# Altium PCB ZD-STM32-ZOUYU(remove layoout).PcbDoc (part 1 of 8)
Units mm, origin at the board's own origin, x right, y up, seen from the top; angles counter-clockwise.
Board outline 251.84 x 139.06 mm, 2 copper layers (Top Layer, Bottom Layer); 253 components, 246 nets, 1172 pads, 599 vias.
Unrouted connection lines stored in the file: 47.
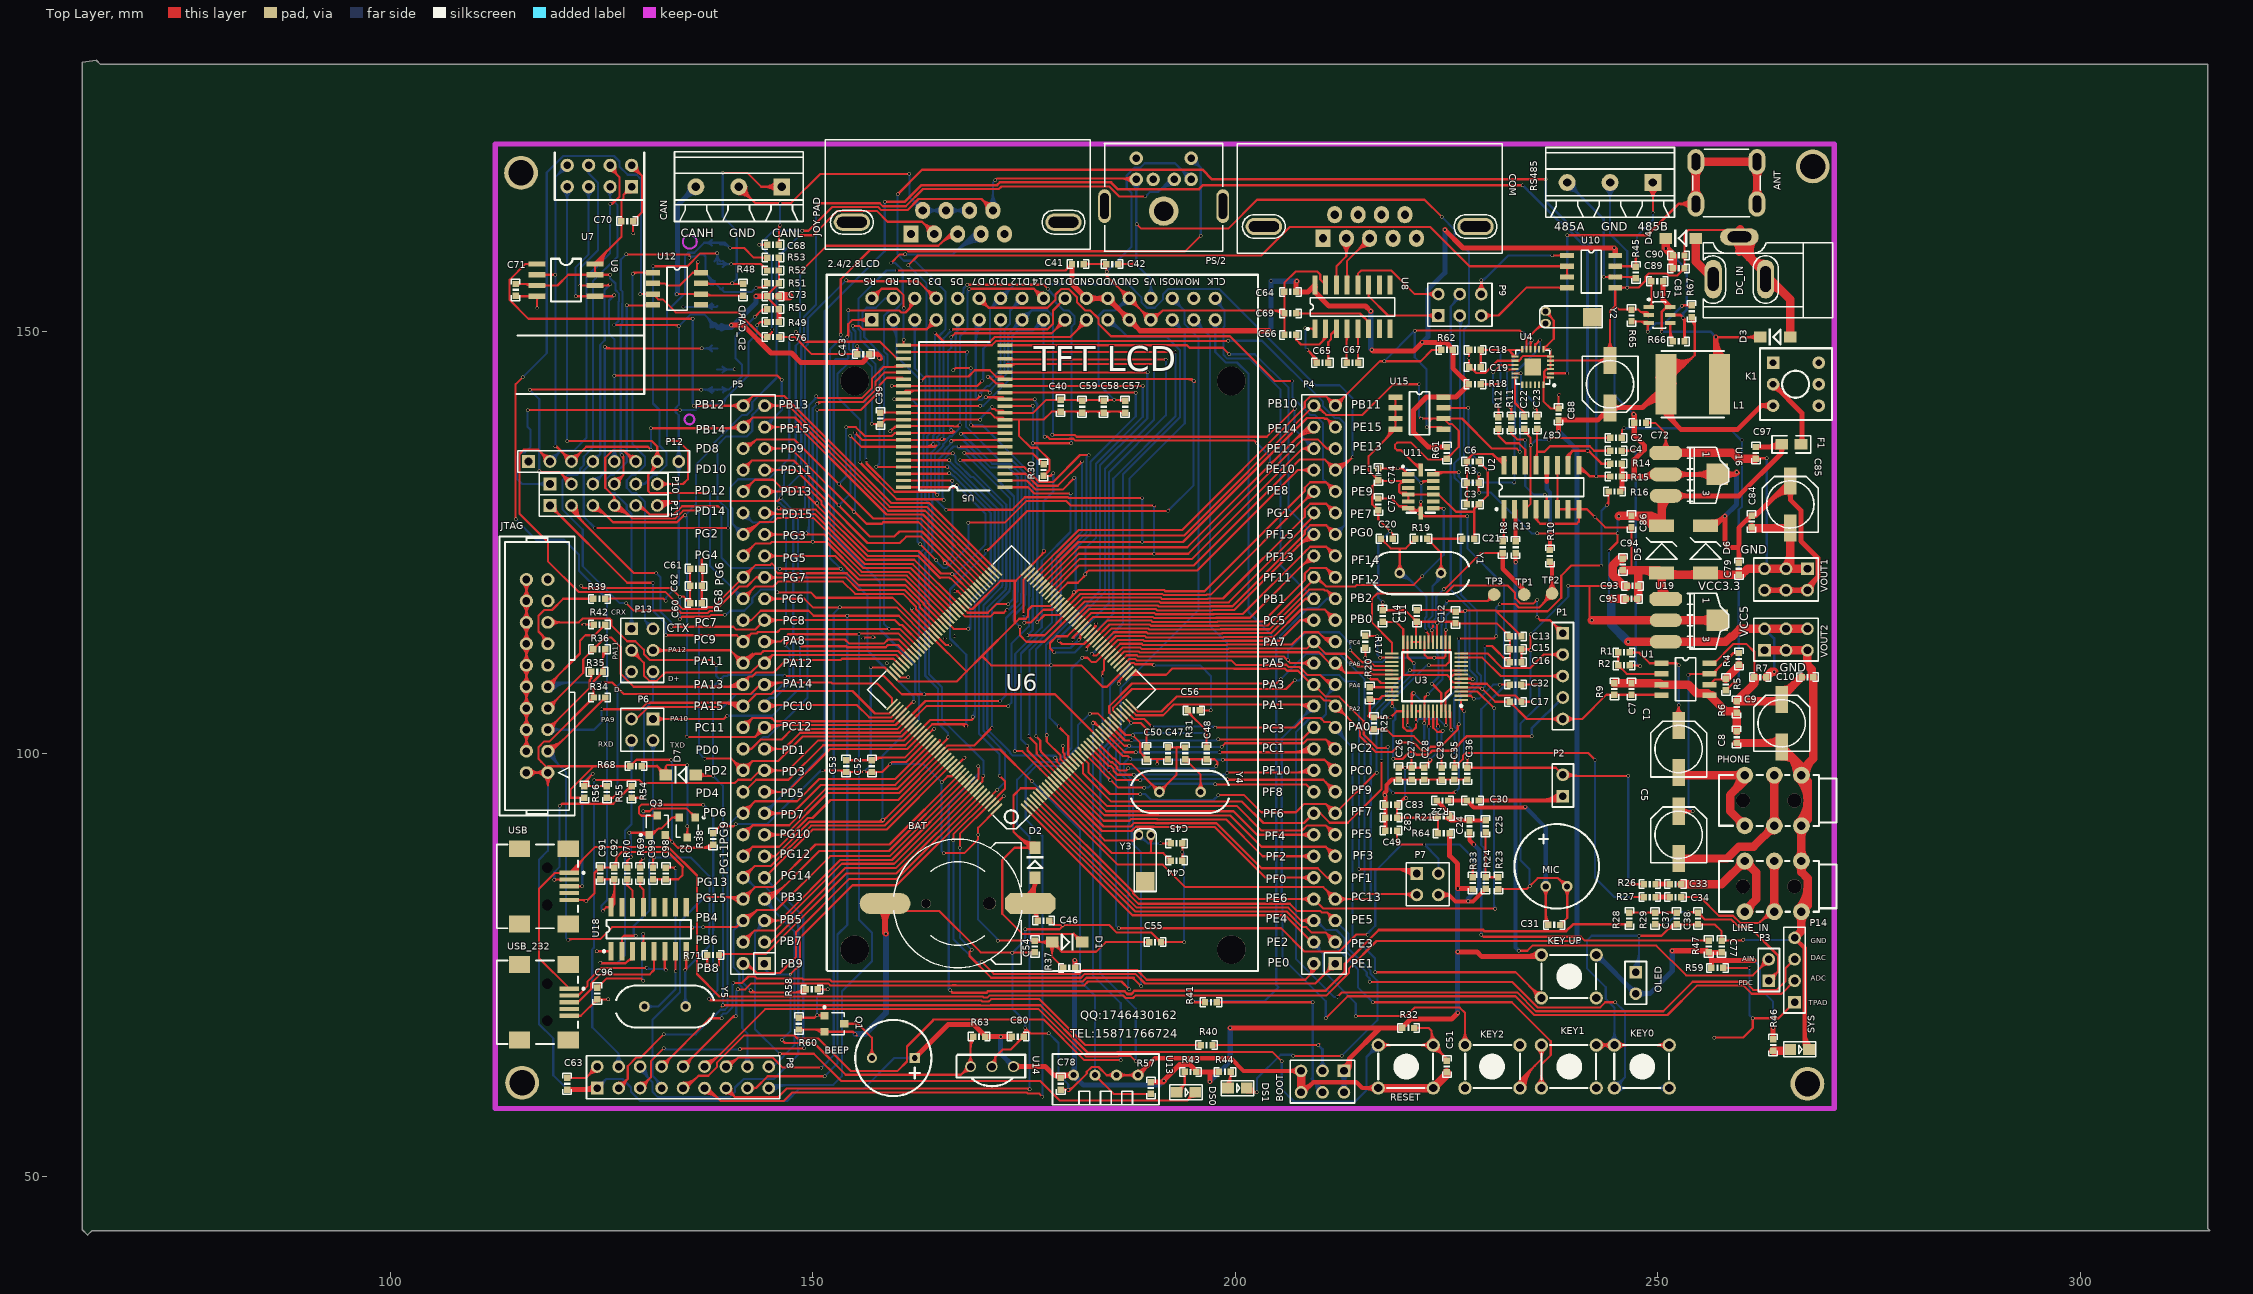
[diagram p0: Top Layer view]
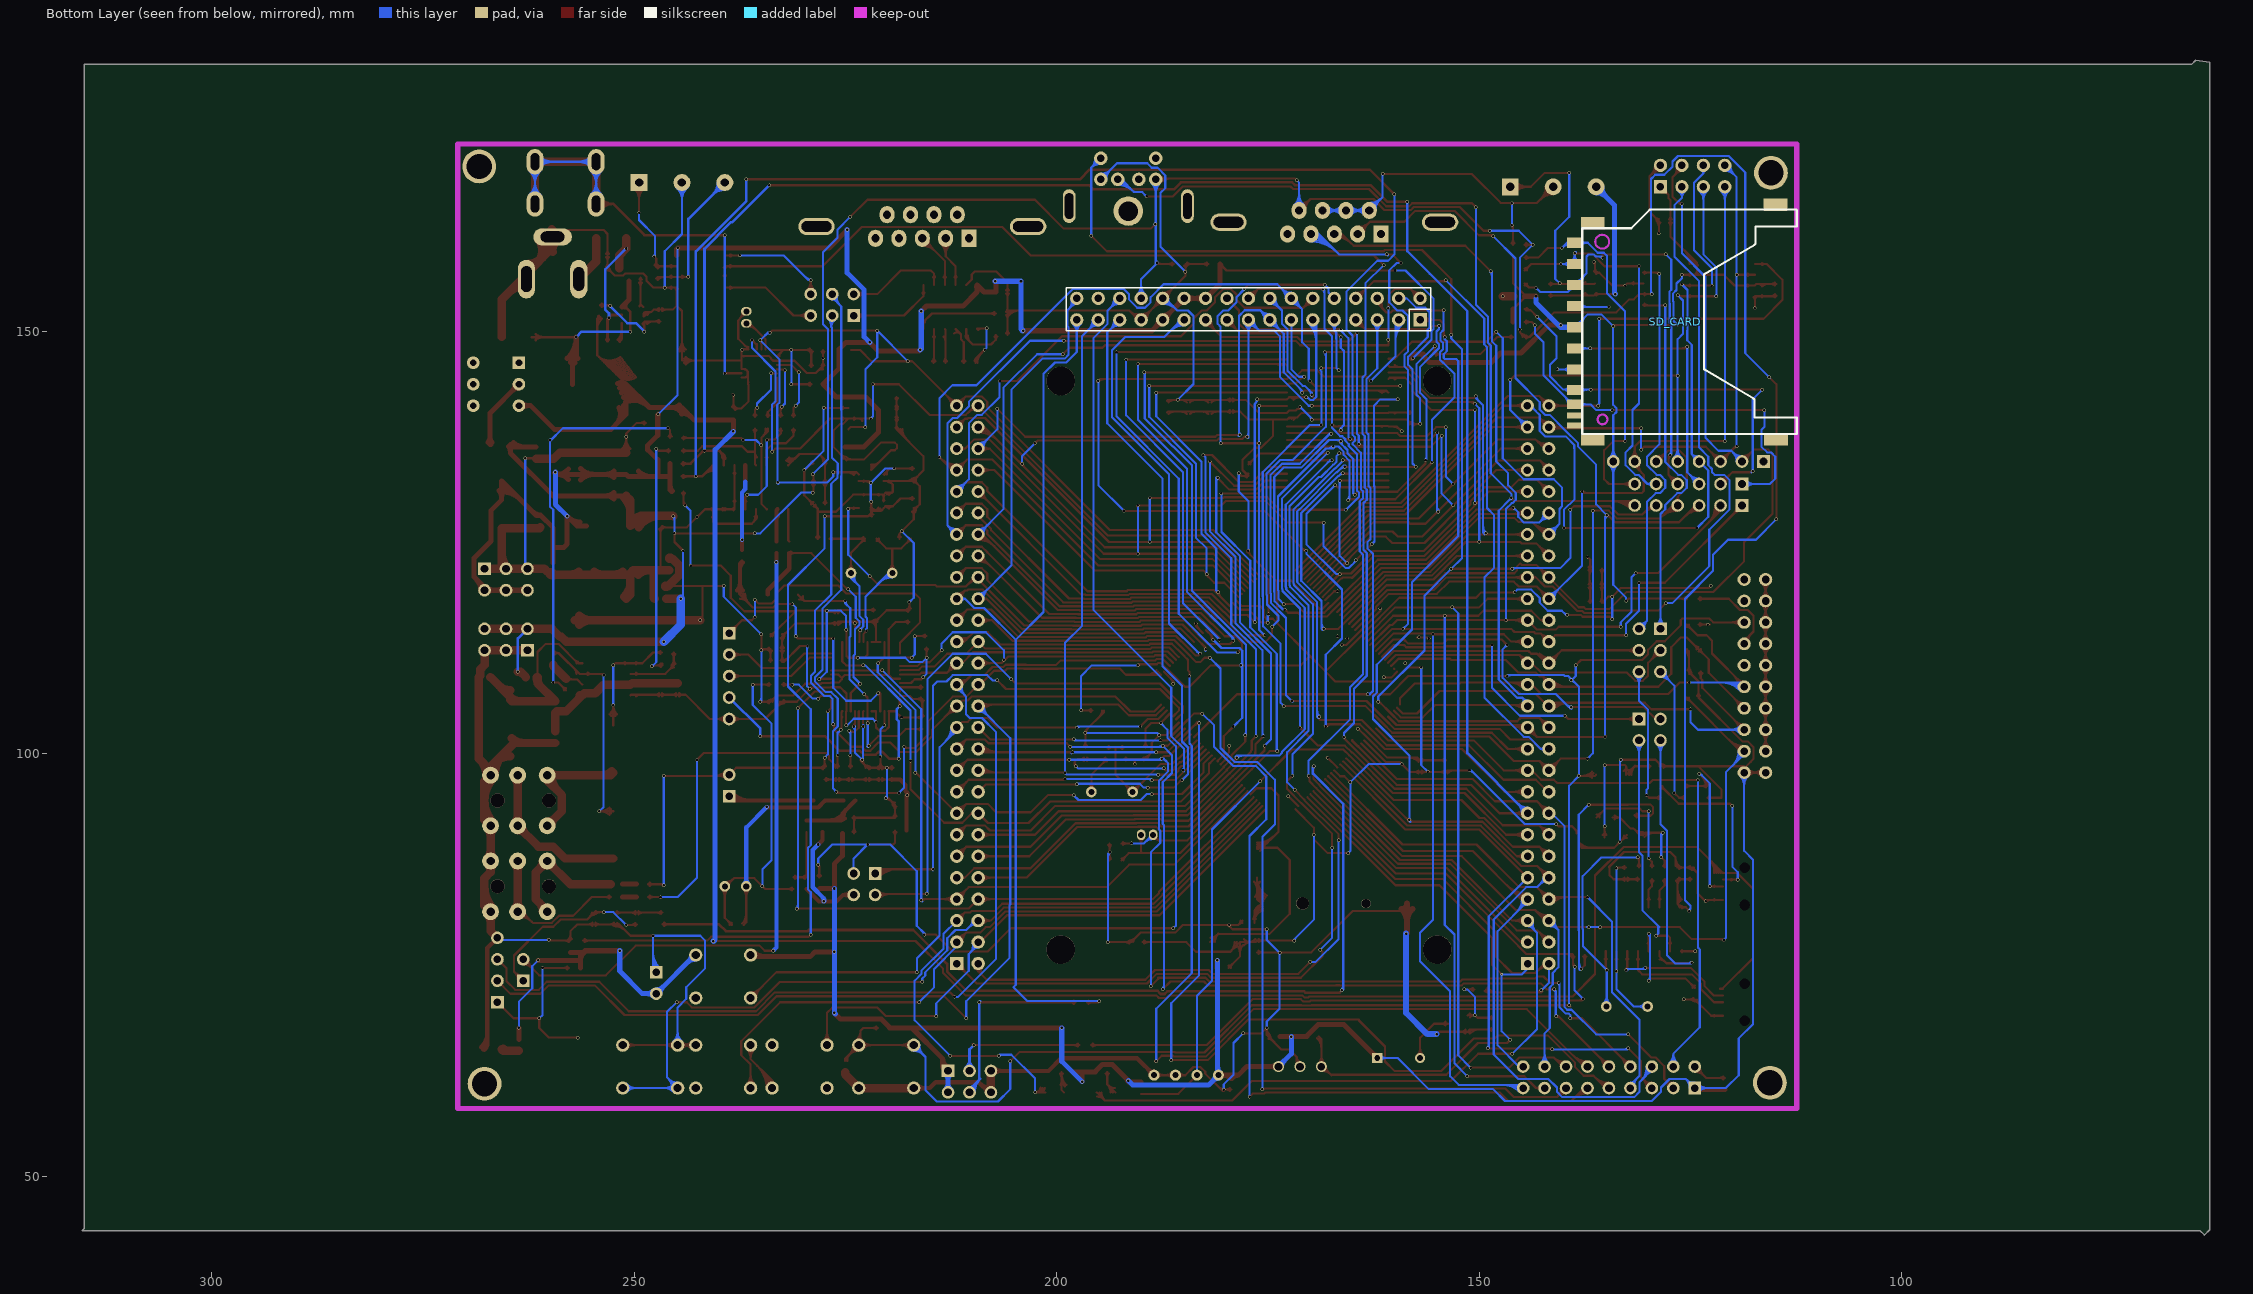
[diagram p1: Bottom Layer view, seen from below]

## Layer stack, top to bottom
Top Solder: solder mask 0.0102, Solder Resist, Dk 3.5
Top Layer: signal copper 0.0356
Dielectric1: dielectric 0.32, FR-4, Dk 4.8
Bottom Layer: signal copper 0.0356
Bottom Solder: solder mask 0.0102, Solder Resist, Dk 3.5

## Board outline
65.151,182.118 65.659,181.61 315.087,181.61 315.087,43.815 315.341,43.561 64.643,43.561 64.135,43.053 63.5,43.688 63.5,181.864

## Design rules (kind name [scope] priority, off if disabled: settings)
Clearance [All] p1: gap=0.2 ignorepadtopadclearanceinfootprint=FALSE except(0: Arc-Hole Track-Hole SMDPad-Hole THPad-Hole Via-Hole Fill-Hole Poly-Hole Region-Hole Text-Hole)
FabricationTestPointUsage TestPointUsage [All] p1: valid=0 allowmultiple=FALSE
FabricationTestpoint Testpoint [All] p1: side=3 testpointundercomponent=TRUE minsize=1.016 maxsize=2.54 preferedsize=1.524 minholesize=0 maxholesize=1.016 preferedholesize=0.813 testpointgrid=0.025 allowsidetop=TRUE allowsidebottom=TRUE usegrid=TRUE gridtolerance=0
PolygonConnect [All] p1: connectstyle=Relief reliefconductorwidth=0.254 reliefentries=4 polygonreliefangle="90 Angle" airgapwidth=0.254
RoutingVias [All] p1: holewidth=0.711 width=1.27 viastyle="Through Hole" minholewidth=0.711 minwidth=1.27 maxholewidth=0.711 maxwidth=1.27
SilkToSolderMaskClearance SilkscreenOverComponentPads [IsPad] p1: minsilkscreentomaskgap=0.254 clearancetoexposedcopper=TRUE
SolderMaskExpansion [All] p1: expansion=0.102
Width [All] p1: maxlimit=2 minlimit=0.254 preferedwidth=0.254
27 further rules are at their usual default settings.

## Classes and differential pairs
component class ZD-STM32: 2.4/2.8LCD BAT BOOT C39 C40 C41 C42 C43 C44 C45 C46 C47 C48 C49 C50 C51 C52 C53 C54 C55 C56 C57 C58 C59 C60 C61 C62 D1 D2 JTAG OLED P5 P6 P7 P14 R30 R31 R32 R33 R34 R35 R36 R37 R38 R39 R40 R41 R42 RESET U5 U6 Y3 Y4
component class POWER&USB: C81 C82 C83 C84 C85 C86 C87 C88 C89 C90 C91 C92 C93 C94 C95 C96 C97 C98 C99 D3 D4 D5 D6 D7 DC_IN F1 K1 L1 Q2 Q3 R64 R65 R66 R67 R68 R69 R70 R71 U16 U17 U18 U19 USB_232 VOUT1 VOUT2 Y5
component class DEVICE: BEEP C63 C64 C65 C66 C67 C68 C69 C70 C71 C72 C73 C74 C75 C76 C77 C78 C79 C80 CAN COM DS0 DS1 "JOY PAD" KEY0 KEY1 KEY2 "KEY UP" P8 P9 P10 P11 P12 P13 P14 PS/2 Q1 R43 R44 R45 R46 R47 R48 R49 R50 R51 R52 R53 R54 R55 R56 R57 R58 R59 R60 R61 R62 R63 RS485 SD_CARD SYS U7 U8 U9 U10 U11 U12 U13 U14 U15 USB
component class AUDIO: ANT C1 C2 C3 C4 C5 C6 C7 C8 C9 C10 C11 C12 C13 C14 C15 C16 C17 C18 C19 C20 C21 C22 C23 C24 C25 C26 C27 C28 C29 C30 C31 C32 C33 C34 C35 C36 C37 C38 LINE_IN MIC P1 P2 P3 PHONE R1 R2 R3 R4 R5 R6 R7 R8 R9 R10 R11 R12 R13 R14 R15 R16 R17 R18 R19 R20 R21 R22 R23 R24 R25 R26 R27 R28 R29 TP1 TP2 TP3 U1 U2 U3 U4 Y1 Y2

## Components (designator, comment, footprint, x,y, rotation, side; value= is the part's Value field where it differs from the comment)
2.4/2.8LCD "TFT_LCD" DB2*17 182.372,125.984 r0 top locked
ANT "PCB-11" PCB-11 254.508,165.1 r0 top
BAT "BATT" BATM 167.132,82.296 r90 top
BEEP "BEEP" BELL-5 162.052,64.008 r180 top
BOOT "Header 3X2" HDR2X3 212.852,62.484 r180 top
C1 "220uF" CC6.56.5 252.476,100.584 r270 top
C2 "1UF" 0603P 245.046,137.416 r0 top
C3 "10UF" 0603P 228.092,129.54 r0 top
C4 "1UF" 0603P 245.046,135.892 r0 top
C5 "220uF" CC6.56.5 252.476,90.424 r270 top
C6 "104" 0603P 228.092,134.62 r0 top
C7 "10UF" 0603P 246.888,107.696 r90 top
C8 "10UF" 0603P 259.334,101.981 r90 top
C9 "220uF" CC6.56.5 264.668,103.632 r270 top
C10 "104" 0603P 267.716,109.093 r180 top
C11 "104" 0603P 221.488,116.332 r90 top
C12 "104" 0603P 226.058,116.141 r90 top
C13 "104" 0603P 233.172,113.919 r0 top
C14 "104" 0603P 217.424,116.332 r270 top
C15 "104" 0603P 233.172,112.395 r0 top
C16 "104" 0603P 233.172,110.871 r0 top
C17 "104" 0603P 233.172,106.172 r0 top
C18 "104" 0603P 228.346,147.828 r0 top
C19 "10UF" 0603P 228.346,145.796 r0 top
C20 "22" 0603P 217.932,125.476 r180 top
C21 "22" 0603P 227.584,125.476 r180 top
C22 "1UF" 0603P 234.188,139.192 r90 top
C23 "1UF" 0603P 235.712,139.192 r90 top
C24 "10UF" 0603P 227.711,91.44 r90 top
C25 "10UF" 0603P 229.616,91.44 r90 top
C26 "104" 0603P 219.329,97.663 r90 top
C27 "104" 0603P 220.853,97.663 r90 top
C28 "104" 0603P 222.377,97.663 r90 top
C29 "1UF" 0603P 224.409,97.663 r270 top
C30 "1UF" 0603P 228.092,94.488 r0 top
C31 "1UF" 0603P 237.744,79.756 r180 top
C32 "1UF" 0603P 233.172,108.204 r180 top
C33 "1UF" 0603P 252.095,84.582 r180 top
C34 "1UF" 0603P 252.095,83.058 r180 top
C35 "103" 0603P 225.933,97.663 r90 top
C36 "103" 0603P 227.457,97.663 r90 top
C37 "102" 0603P 252.222,80.518 r90 top
C38 "101" 0603P 254.762,80.518 r90 top
C39 "104" 0603P 157.988,139.7 r90 top
C40 "104" 0603P 179.324,141.224 r270 top
C41 "104" 0603P 181.356,157.988 r180 top
C42 "104" 0603P 185.42,157.988 r0 top
C43 "104" 0603P 155.956,147.32 r180 top
C44 "10" 0603P 193.04,87.376 r180 top
C45 "10" 0603P 193.04,89.408 r180 top
C46 "104" 0603P 177.292,80.264 r180 top
C47 "104" 0603P 192.024,100.076 r90 top
C48 "104" 0603P 196.596,100.076 r270 top
C49 "104" 0603P 218.44,90.932 r0 top
C50 "104" 0603P 189.484,100.076 r90 top
C51 "104" 0603P 225.044,62.992 r90 top
C52 "104" 0603P 156.972,98.552 r90 top
C53 "104" 0603P 153.924,98.552 r90 top
C54 "104" 0603P 176.276,77.216 r270 top
C55 "104" 0603P 190.5,77.724 r0 top
C56 "104" 0603P 195.072,105.156 r180 top
C57 "104" 0603P 186.944,141.097 r90 top
C58 "104" 0603P 184.404,141.097 r90 top
C59 "104" 0603P 181.864,141.097 r90 top
C60 "104" 0603P 136.144,117.856 r0 top
C61 "104" 0603P 136.144,121.92 r0 top
C62 "104" 0603P 136.144,119.888 r0 top
C63 "104" 0603P 120.904,60.96 r90 top
C64 "104" 0603P 206.502,154.686 r180 top
C65 "104" 0603P 210.312,146.304 r180 top
C66 "104" 0603P 206.502,149.606 r0 top
C67 "104" 0603P 213.868,146.304 r180 top
C68 "104" 0603P 145.288,160.274 r180 top
C69 "104" 0603P 206.502,152.146 r0 top
C70 "104" 0603P 128.016,163.068 r0 top
C71 "104" 0603P 114.808,154.94 r270 top
C72 "104" 0603P 247.904,139.192 r0 top
C73 "104" 0603P 145.288,154.178 r180 top
C74 "104" 0603P 216.916,133.096 r90 top
C75 "104" 0603P 216.916,129.54 r90 top
C76 "104" 0603P 145.288,149.352 r0 top
C77 "104" 0603P 257.556,77.216 r270 top
C78 "104" 0603P 179.324,60.96 r90 top
C79 "104" 0603P 259.588,121.92 r90 top
C80 "104" 0603P 174.244,66.548 r180 top
C81 "103" 0603P 249.936,155.956 r0 top
C82 "104" 0603P 218.44,92.456 r0 top
C83 "104" 0603P 218.44,93.98 r0 top
C84 "104" 0603P 261.112,127.508 r90 top
C85 "220uF" CC6.56.5 265.684,129.54 r270 top
C86 "104" 0603P 246.888,127.508 r90 top
C87 "104" 0603P 238.252,140.208 r270 top
C88 "220uF" CC6.56.5 244.348,143.764 r90 top
C89 "104" 0603P 252.476,157.48 r180 top
C90 "104" 0603P 252.476,159.004 r180 top
C91 "104" 0603P 124.841,85.852 r90 top
C92 "104" 0603P 126.492,85.852 r90 top
C93 "104" 0603P 247.015,119.888 r180 top
C94 "104" 0603P 245.872,122.428 r90 top
C95 "104" 0603P 246.888,118.364 r180 top
C96 "104" 0603P 124.46,71.628 r90 top
C97 "104" 0603P 261.62,135.636 r90 top
C98 "22" 0603P 132.588,85.852 r90 top
C99 "22" 0603P 131.064,85.852 r90 top
CAN "CAN" MKDSN_3RMI 146.304,167.132 r180 top
COM "USART" DB9 215.9,161.036 r0 top
D1 "1N4148" DIODE_SOP 178.308,77.724 r0 top
D2 "1N4148" DIODE_SOP 176.276,85.344 r90 top
D3 "SS14" DIODE_SOP 265.684,149.352 r180 top
D4 "ss14" DIODE_SOP 254.508,161.036 r180 top
D5 "SMBJ5.0A" SMBJ 250.444,124.079 r90 top
D6 "SMBJ5.0A" SMBJ 255.651,124.079 r90 top
D7 "1N4148" DIODE_SOP 136.144,97.536 r180 top
DC_IN "POWER" DC10B 267.208,160.528 r180 top (schematic designator DC_IN?)
DS0 "LED1" SMDLED 193.04,59.944 r0 top
DS1 "LED1" SMDLED 199.136,60.452 r0 top
F1 "500MA" 0805 264.668,136.652 r0 top
"JOY PAD" "JOY" DB9 167.132,161.544 r0 top
JTAG "JTAG" JTAG_20 117.348,109.22 r90 top locked
K1 "BUTTON" BTN8.5*8.5 263.652,146.304 r0 top
KEY0 "KEY_M" KEY_M 244.856,65.532 r0 top
KEY1 "KEY_M" KEY_M 236.22,65.532 r0 top
KEY2 "KEY_M" KEY_M 233.68,60.452 r180 top
"KEY UP" "KEY_M" KEY_M 236.22,76.2 r0 top
L1 "4.7uH" L_SOP74 250.952,143.764 r0 top
LINE_IN "LINE_IN" PHONE_ST 263.652,84.328 r0 top
MIC "MIC" MIC 236.728,84.328 r0 top
OLED "MIC/LINE" HDR1X2 247.396,74.168 r270 top
P1 "IIS" HDR1X5 238.76,114.3 r270 top
P2 "MIC/LINE" HDR1X2 238.76,94.996 r90 top
P3 "OLED_VCC" HDR1X2 263.144,73.152 r90 top
P4 "HEAD2*27" HEAD2*27 211.836,75.184 r90 top
P5 "HEAD2*27" HEAD2*27 144.272,75.184 r90 top locked
P6 "VREF" HDR2X2 131.064,104.14 r180 top
P7 "VREF" HDR2X2 221.488,85.852 r270 top
P8 "OV7670" HDR2X9 124.46,60.452 r0 top
P9 "RS232/RS485" HDR2X3 224.028,151.892 r0 top
P10 "SDCARD" HDR1X6 118.872,131.953 r0 top (schematic designator "P10 SDCARD")
P11 "SDCARD" HDR1X6 118.872,129.413 r0 top (schematic designator "P11 SDIO")
P12 "SDSPI&NET" HDR1X8 116.332,134.62 r0 top (schematic designator "P12 SDSPI&NET")
P13 "USB/CAN" HDR2X3 128.524,114.808 r270 top
P14 "Header 4" HDR1X4 266.192,70.612 r90 top
PHONE "PHONE_M" PHONE_ST 263.652,94.488 r0 top
PS/2 "PS/2" PS2-6PIN 191.516,159.512 r180 top
Q1 "S8050" SOT-23R 152.4,68.072 r270 top
Q2 "S8050" SOT-23R 135.128,91.44 r180 top
Q3 "S8550" SOT-23R 131.572,91.44 r0 top
R1 "10K" 0603P 245.999,112.014 r0 top
R2 "10K" 0603P 245.999,110.49 r180 top
R3 "10R" 0603P 228.092,132.08 r0 top
R4 "10K" 0603P 259.588,111.252 r90 top
R5 "10K" 0603P 258.064,108.204 r90 top
R6 "10K" 0603P 259.334,105.537 r90 top
R7 "10R" 0603P 262.128,109.093 r0 top
R8 "1K" 0603P 231.648,124.46 r90 top
R9 "10K" 0603P 244.856,107.696 r90 top
R10 "1K" 0603P 237.236,123.444 r90 top
R11 "1K" 0603P 232.664,139.192 r270 top
R12 "1K" 0603P 231.14,139.192 r270 top
R13 "1K" 0603P 233.172,124.46 r90 top
R14 "10K" 0603P 245.046,134.368 r0 top
R15 "10K" 0603P 245.046,132.844 r0 top
R16 "0R" 0603P 244.856,131.064 r0 top
R17 "100K" 0603P 215.392,113.284 r270 top
R18 "10R" 0603P 228.346,143.764 r180 top
R19 "1M" 0603P 221.996,125.476 r0 top
R20 "100K" 0603P 215.9,107.188 r90 top
R21 "1K" 0603P 224.663,92.634 r180 top
R22 "1K" 0603P 224.536,94.488 r180 top
R23 "1K" 0603P 231.14,84.709 r270 top
R24 "1K" 0603P 229.616,84.709 r90 top
R25 "1K" 0603P 216.408,103.632 r270 top
R26 "510" 0603P 249.047,84.582 r180 top
R27 "510" 0603P 249.047,83.058 r180 top
R28 "4.7K" 0603P 246.634,80.518 r90 top
R29 "47K" 0603P 249.682,80.518 r270 top
R30 "10K" 0603P 177.292,133.604 r270 top
R31 "1M" 0603P 194.056,100.076 r270 top
R32 "10K" 0603P 220.472,67.564 r180 top
R33 "10R" 0603P 228.092,84.709 r270 top
R34 "10K" 0603P 124.714,106.68 r0 top
R35 "10K" 0603P 124.46,109.728 r180 top
R36 "10K" 0603P 124.714,112.395 r180 top
R37 "0" 0603P 180.34,74.676 r180 top
R38 "0" 0603P 138.176,89.916 r90 top
R39 "10K" 0603P 124.714,118.364 r180 top
R40 "100K" 0603P 196.596,65.532 r0 top
R41 "100K" 0603P 197.104,70.612 r180 top
R42 "10K" 0603P 124.714,115.316 r0 top
R43 "510" 0603P 194.691,62.357 r0 top
R44 "510" 0603P 198.755,62.357 r180 top
R45 "120" 0603P 247.396,156.972 r90 top
R46 "510" 0603P 263.652,65.532 r90 top
R47 "10R" 0603P 256.032,77.216 r270 top
R48 "120" 0603P 141.732,154.94 r90 top
R49 "47K" 0603P 145.288,151.13 r180 top
R50 "47K" 0603P 145.288,152.654 r180 top
R51 "47K" 0603P 145.288,155.702 r180 top
R52 "47K" 0603P 145.288,157.226 r180 top
R53 "47K" 0603P 145.288,158.75 r180 top
R54 "10R" 0603P 128.524,95.504 r90 top
R55 "10R" 0603P 125.603,95.504 r90 top
R56 "1.5K" 0603P 122.936,95.504 r90 top
R57 "4.7K" 0603P 189.992,60.452 r90 top
R58 "1K" 0603P 149.86,72.136 r180 top
R59 "5.1M" 0603P 257.048,74.676 r180 top
R60 "10K" 0603P 148.336,68.072 r90 top
R61 "4.7K" 0603P 225.044,135.636 r90 top
R62 "4.7K" 0603P 225.044,147.828 r0 top
R63 "4.7K" 0603P 169.672,66.548 r0 top
R64 "10R" 0603P 224.663,90.602 r0 top
R65 "9.53K" 0603P 246.888,151.892 r90 top
R66 "100K" 0603P 252.476,148.844 r180 top
R67 "49.9K" 0603P 254,152.4 r90 top
R68 "10K" 0603P 129.032,98.552 r0 top
R69 "1K" 0603P 129.54,85.852 r90 top
R70 "1K" 0603P 128.016,85.852 r90 top
R71 "1K" 0603P 138.176,76.2 r0 top
RESET "KEY_M" KEY_M 216.916,65.532 r0 top
RS485 "RS485" MKDSN_3RMI 249.428,167.64 r180 top
SD_CARD "sd card" SDCARD_L 138.684,157.988 r90 bottom
SYS "LED1" SMDLED 265.684,65.024 r0 top
TP1 "TEST POINT" TP-1.5 234.188,118.872 r0 top
TP2 "TEST POINT" TP-1.5 237.49,118.999 r90 top
TP3 "TEST POINT" TP-1.5 230.632,118.872 r90 top
U1 "TDA1308T" SOP-8 250.444,110.744 r0 top
U2 "74HC4052" SOP16M 236.22,131.572 r0 top
U3 "VS1053B/VS1003B" mTQFP48 222.504,107.696 r180 top
U4 "RDA5820" QFN24 235.204,145.796 r180 top
U5 "IS62WV51216" TSOP44 172.72,131.572 r180 top
U6 "STM32F103ZET6" LQFP144 175.26,93.472 r135 top locked
U7 "NRF24L01" NRF24L01 128.524,169.672 r90 top
U8 "SP3232" SOP16M 213.868,152.908 r0 top
U9 "W25Q64" SOIC-8 117.348,157.988 r0 top
U10 "SP3485" SOP-8 239.268,159.004 r0 top
U11 "ADXL345Z" LGA14 220.472,133.096 r0 top
U12 "TJA1050" SOP-8 131.064,156.972 r0 top
U13 "DHT11&DS18B20" DHT11 180.848,61.976 r0 top
U14 "HS0038" HS0038 168.656,62.992 r0 top
U15 "24C02" SOP-8 218.948,142.24 r0 top
U16 "AMS1117-3.3" AMS1117 250.952,135.636 r270 top
U17 "MP2359" SOT-23-6 248.92,152.908 r0 top
U18 "CH340G" SOP16M 130.556,79.248 r0 top
U19 "AMS1117-1.8" AMS1117 250.952,118.364 r270 top
USB "USB" USB/SM0.8-6H5 113.284,84.328 r180 top
USB_232 "USB" USB/SM0.8-6H5 113.284,70.612 r180 top
VOUT1 "VCC3.3" HDR2X3 267.716,121.92 r180 top
VOUT2 "VCC5" HDR2X3 262.636,112.268 r0 top
Y1 "12.288MHz" XTAL_US 219.456,121.412 r0 top
Y2 "32.768KHz" XTAL32 236.728,152.4 r0 top
Y3 "32.768K" XTAL32 189.992,90.424 r270 top
Y4 "8MHz" XTAL_US 191.008,95.504 r0 top
Y5 "12.288MHz" XTAL_US 130.048,70.104 r0 top

## Footprints (in the part's own frame and the unit in brackets; to place one, negate y for a bottom-side part, rotate by r counter-clockwise, add the part's x,y. Pads: shape width x height; smd on the part's side, far side on the other; paste and mask are expansions set on the pad)
0603P [mil]
  rect 30x30 smd: 1(-27,0) 2(27.5,-0.06)
  silkscreen extent -50,-20 50,20
0805 [mil]
  rect 60x50 smd: 1(0,0) 2(90,0)
  silkscreen extent -45,-40 135,40
AMS1117 [mil]
  oct 65x150 smd: 1(0.03,-0.06)
  oval 65x150 smd: 2(100.03,-0.06) 3(200.03,-0.06)
  rect 100x100 smd: 4(100.03,239.94)
  silkscreen extent -26,100 234,293
BATM [mm]
  round 1.1 hole 1.1 unplated: 0(0,3.748)
  round 1.5 hole 1.5 unplated: 0(0.025,-3.752)
  oct 2.5x6 smd: 1(0,-8.602)
  oval 2.5x6 smd: 2(0,8.598)
  silkscreen extent -7.62,-7.58 7.62,7.57
BELL-5 [mm]
  rect 1.2x1.2 hole 0.7: 1(0,0)
  round 1.2 hole 0.7: 2(5.08,0)
  silkscreen extent -1.97,-4.51 7.05,4.51
BTN8.5*8.5 [mm]
  rect 1.5x1.5 hole 0.8: 1(0,0)
  round 1.5 hole 0.8: 2(0,-2.54) 3(0,-5.08) 4(5.4,-5.08) 5(5.4,-2.54) 6(5.4,0)
  silkscreen extent -1.55,-6.79 6.95,1.71
CC6.56.5 [mm]
  rect 3.2x1.5 smd: 1(-2.794,0) 2(2.8,0)
  silkscreen extent -3.3,-3.3 3.3,3.3
DB2*17 [mil]
  rect 62x62 hole 35: 1(-1000,1000)
  round 62 hole 35: 2(-1000,1100) 3(-900,1000) 4(-900,1100) 5(-800,1000) 6(-800,1100) 7(-700,1000) 8(-700,1100) 9(-600,1000) 10(-600,1100) 11(-500,1000) 12(-500,1100) 13(-400,1000) 14(-400,1100) 15(-300,1000) 16(-300,1100) 17(-200,1000) 18(-200,1100) 19(-100,1000) 20(-100,1100) 21(0,1000) 22(0,1100) 23(100,1000) 24(100,1100) 25(200,1000) 26(200,1100) 27(300,1000) 28(300,1100) 29(400,1000) 30(400,1100) 31(500,1000) 32(500,1100) 33(600,1000) 34(600,1100)
  round 133.86 hole 133.86: ""(-1080,-1935) ""(-1080,715) ""(675,-1935) ""(675,715)
  silkscreen extent -1210,-2035 800,1210
DB9 [mil]
  oval 170x80 hole 50 slot 140 at 0 deg: 0(-493,55) 0(493,55)
  rect 70x80 hole 38: 1(-218,0)
  oval 70x80 hole 38: 2(-109,0) 3(0,0) 4(109,0) 5(218,0) 6(-163,110) 7(-54,110) 8(55,110) 9(164,110)
  silkscreen extent -618,-70 618,440
DC10B [mil]
  oval 80x180 hole 50 slot 110 at 90 deg: 1(419.09,170)
  oval 80x180 hole 50 slot 120 at 90 deg: 2(175,170)
  oval 180x80 hole 50 slot 110 at 0 deg: 3(297.05,-26.85)
  silkscreen extent -138,0 465,350
DHT11 [mm]
  round 1.3 hole 0.7: 1(0,0) 2(2.54,0) 3(5.08,0) 4(7.62,0)
  silkscreen extent -2.5,-3.5 10.12,2.5
DIODE_SOP [mm]
  rect 1.5x1.3 smd: 1(0,0) 2(3.556,0)
  silkscreen extent 1.14,-1.02 2.56,1.02
HDR1X2 [mm]
  rect 1.5x1.5 hole 0.9: 1(0,0)
  round 1.5 hole 0.9: 2(2.54,0)
  silkscreen extent -1.27,-1.27 3.81,1.27
HDR1X4 [mm]
  rect 1.5x1.5 hole 0.9: 1(0,0)
  round 1.5 hole 0.9: 2(2.54,0) 3(5.08,0) 4(7.62,0)
  silkscreen extent -1.27,-1.27 8.89,1.27
HDR1X5 [mm]
  rect 1.5x1.5 hole 0.9: 1(0,0)
  round 1.5 hole 0.9: 2(2.54,0) 3(5.08,0) 4(7.62,0) 5(10.16,0)
  silkscreen extent -1.27,-1.27 11.43,1.27
HDR1X6 [mm]
  rect 1.5x1.5 hole 0.9: 1(0,0)
  round 1.5 hole 0.9: 2(2.54,0) 3(5.08,0) 4(7.62,0) 5(10.16,0) 6(12.7,0)
  silkscreen extent -1.27,-1.27 13.97,1.27
HDR1X8 [mm]
  rect 1.5x1.5 hole 0.9: 1(0,0)
  round 1.5 hole 0.9: 2(2.54,0) 3(5.08,0) 4(7.62,0) 5(10.16,0) 6(12.7,0) 7(15.24,0) 8(17.78,0)
  silkscreen extent -1.27,-1.27 19.05,1.27
HDR2X2 [mm]
  rect 1.5x1.5 hole 0.9: 1(0,0)
  round 1.5 hole 0.9: 2(0,2.54) 3(2.54,0) 4(2.54,2.54)
  silkscreen extent -1.27,-1.27 3.81,3.81
HDR2X3 [mm]
  rect 1.5x1.5 hole 0.9: 1(0,0)
  round 1.5 hole 0.9: 2(0,2.54) 3(2.54,0) 4(2.54,2.54) 5(5.08,0) 6(5.08,2.54)
  silkscreen extent -1.27,-1.27 6.35,3.81
HDR2X9 [mm]
  rect 1.5x1.5 hole 0.9: 1(0,0)
  round 1.5 hole 0.9: 2(0,2.54) 3(2.54,0) 4(2.54,2.54) 5(5.08,0) 6(5.08,2.54) 7(7.62,0) 8(7.62,2.54) 9(10.16,0) 10(10.16,2.54) 11(12.7,0) 12(12.7,2.54) 13(15.24,0) 14(15.24,2.54) 15(17.78,0) 16(17.78,2.54) 17(20.32,0) 18(20.32,2.54)
  silkscreen extent -1.27,-1.27 21.59,3.81
HEAD2*27 [mil]
  rect 62x62 hole 35: 1(0.43,0.42)
  round 62 hole 35: 2(0.43,100.42) 3(100.43,0.42) 4(100.43,100.42) 5(200.43,0.42) 6(200.43,100.42) 7(300.43,0.42) 8(300.43,100.42) 9(400.43,0.42) 10(400.43,100.42) 11(500.43,0.42) 12(500.43,100.42) 13(600.43,0.42) 14(600.43,100.42) 15(700.43,0.42) 16(700.43,100.42) 17(800.43,0.42) 18(800.42,100.42) 19(900.43,0.42) 20(900.43,100.42) 21(1000.43,0.42) 22(1000.43,100.42) 23(1100.43,0.42) 24(1100.43,100.42) 25(1200.43,0.42) 26(1200.43,100.42) 27(1300.43,0.42) 28(1300.42,100.42) 29(1400.43,0.42) 30(1400.43,100.42) 31(1500.43,0.42) 32(1500.43,100.42) 33(1600.43,0.42) 34(1600.43,100.42)
  round 60 hole 35: 35(1700,0) 36(1700,100) 37(1800,0) 38(1800,100) 39(1900,0) 40(1900,100) 41(2000,0) 42(2000,100) 43(2100,0) 44(2100,100) 45(2200,0) 46(2200,100) 47(2300,0) 48(2300,100) 49(2400,0) 50(2400,100) 51(2500,0) 52(2500,100) 53(2600,0) 54(2600,100)
  silkscreen extent -50,-50 2650,157
HS0038 [mm]
  round 1.3 hole 0.9: 1(0,0) 2(2.54,0) 3(5.08,0)
  silkscreen extent -1.65,-2.32 6.48,1.4
JTAG_20 [mm]
  oval 1.5x1.575 hole 0.9: 1(-11.43,-1.27) 2(-11.43,1.27) 3(-8.89,-1.27) 4(-8.89,1.27) 5(-6.35,-1.27) 6(-6.35,1.27) 7(-3.81,-1.27) 8(-3.81,1.27) 9(-1.27,-1.27) 10(-1.27,1.27) 11(1.27,-1.27) 12(1.27,1.27) 13(3.81,-1.27) 14(3.81,1.27) 15(6.35,-1.27) 16(6.35,1.27) 17(8.89,-1.27) 18(8.89,1.27) 19(11.43,-1.27) 20(11.43,1.27)
  silkscreen extent -16.51,-4.45 16.51,4.45
KEY_M [mil]
  round 62 hole 38: 1(0,0) 1(255.91,0) 2(0,-200) 2(255.91,-200)
  silkscreen extent 0,-200 255,0
L_SOP74 [mm]
  rect 2.5x7.2 smd: 1(0,0) 2(6.35,0)
  silkscreen extent -0.51,-3.94 6.89,3.94
LGA14 [mm]
  rect 1.5x0.5 smd: 1(0,0) 2(0,-0.8) 3(0,-1.6) 4(0,-2.4) 5(0,-3.2) 6(0,-4) 8(2.954,-4) 9(2.954,-3.2) 10(2.954,-2.4) 11(2.954,-1.6) 12(2.954,-0.8) 13(2.954,0)
  rect 0.5x1.5 smd: 7(1.473,-4.572) 14(1.473,0.508)
  silkscreen extent -0.76,-4.55 3.17,1.03
LQFP144 [mm]
  rect 1.8x0.254 smd: 1(-0.009,0.001) 2(-0.009,-0.499) 3(-0.009,-0.999) 4(-0.009,-1.499) 5(-0.009,-1.999) 6(-0.009,-2.499) 7(-0.009,-2.999) 8(-0.009,-3.499) 9(-0.009,-3.999) 10(-0.009,-4.499) 11(-0.009,-4.999) 12(-0.009,-5.499) 13(-0.009,-5.999) 14(-0.009,-6.499) 15(-0.009,-6.999) 16(-0.009,-7.499) 17(-0.009,-7.999) 18(-0.009,-8.499) 19(-0.009,-8.999) 20(-0.009,-9.499) 21(-0.009,-9.999) 22(-0.009,-10.499) 23(-0.009,-10.999) 24(-0.009,-11.499) 25(-0.009,-11.999) 26(-0.009,-12.499) 27(-0.009,-12.999) 28(-0.009,-13.499) 29(-0.009,-13.999) 30(-0.009,-14.499) 31(-0.009,-14.999) 32(-0.009,-15.499) 33(-0.009,-15.999) 34(-0.009,-16.499) 35(-0.009,-16.999) 36(-0.009,-17.499) 73(22.491,-17.499) 74(22.491,-16.999) 75(22.491,-16.499) 76(22.491,-15.999) 77(22.491,-15.499) 78(22.491,-14.999) 79(22.491,-14.499) 80(22.491,-13.999) 81(22.491,-13.499) 82(22.491,-12.999) 83(22.491,-12.499) 84(22.491,-11.999) 85(22.491,-11.499) 86(22.491,-10.999) 87(22.491,-10.499) 88(22.491,-9.999) 89(22.491,-9.499) 90(22.491,-8.999) 91(22.491,-8.499) 92(22.491,-7.999) 93(22.491,-7.499) 94(22.491,-6.999) 95(22.491,-6.499) 96(22.491,-5.999) 97(22.491,-5.499) 98(22.491,-4.999) 99(22.491,-4.499) 100(22.491,-3.999) 101(22.491,-3.499) 102(22.491,-2.999) 103(22.491,-2.499) 104(22.491,-1.999) 105(22.491,-1.499) 106(22.491,-0.999) 107(22.491,-0.499) 108(22.491,0.001)
  rect 0.254x1.8 smd: 37(2.491,-19.999) 38(2.991,-19.999) 39(3.491,-19.999) 40(3.991,-19.999) 41(4.491,-19.999) 42(4.991,-19.999) 43(5.491,-19.999) 44(5.991,-19.999) 45(6.491,-19.999) 46(6.991,-19.999) 47(7.491,-19.999) 48(7.991,-19.999) 49(8.491,-19.999) 50(8.991,-19.999) 51(9.491,-19.999) 52(9.991,-19.999) 53(10.491,-19.999) 54(10.991,-19.999) 55(11.491,-19.999) 56(11.991,-19.999) 57(12.491,-19.999) 58(12.991,-19.999) 59(13.491,-19.999) 60(13.991,-19.999) 61(14.491,-19.999) 62(14.991,-19.999) 63(15.491,-19.999) 64(15.991,-19.999) 65(16.491,-19.999) 66(16.991,-19.999) 67(17.491,-19.999) 68(17.991,-19.999) 69(18.491,-19.999) 70(18.991,-19.999) 71(19.491,-19.999) 72(19.991,-19.999) 109(19.991,2.501) 110(19.491,2.501) 111(18.991,2.501) 112(18.491,2.501) 113(17.991,2.501) 114(17.491,2.501) 115(16.991,2.501) 116(16.491,2.501) 117(15.991,2.501) 118(15.491,2.501) 119(14.991,2.501) 120(14.491,2.501) 121(13.991,2.501) 122(13.491,2.501) 123(12.991,2.501) 124(12.491,2.501) 125(11.991,2.501) 126(11.491,2.501) 127(10.991,2.501) 128(10.491,2.501) 129(9.991,2.501) 130(9.491,2.501) 131(8.991,2.501) 132(8.491,2.501) 133(7.991,2.501) 134(7.491,2.501) 135(6.991,2.501) 136(6.491,2.501) 137(5.991,2.501) 138(5.491,2.501) 139(4.991,2.501) 140(4.491,2.501) 141(3.991,2.501) 142(3.491,2.501) 143(2.991,2.501) 144(2.491,2.501)
  silkscreen extent -0.81,-20.8 23.29,3.3
MIC [mil]
  round 50 hole 28: 1(0.42,0.29) 2(100.42,0.29)
  silkscreen extent -145,-104 248,290
MKDSN_3RMI [mm]
  rect 2x2 hole 1: 1(0,0)
  round 2 hole 1: 2(5.08,0) 3(10.16,0)
  silkscreen extent -2.54,-4.15 12.7,4.11
mTQFP48 [mm]
  rect 1.6x0.254 smd: 1(-4.223,1.3) 2(-4.223,0.8) 3(-4.223,0.3) 4(-4.223,-0.2) 5(-4.223,-0.7) 6(-4.223,-1.2) 7(-4.223,-1.7) 8(-4.223,-2.2) 9(-4.223,-2.7) 10(-4.223,-3.2) 11(-4.223,-3.7) 12(-4.223,-4.2) 25(3.977,-4.2) 26(3.977,-3.7) 27(3.977,-3.2) 28(3.977,-2.7) 29(3.977,-2.2) 30(3.977,-1.7) 31(3.977,-1.2) 32(3.977,-0.7) 33(3.977,-0.2) 34(3.977,0.3) 35(3.977,0.8) 36(3.977,1.3)
  rect 0.254x1.6 smd: 13(-2.873,-5.55) 14(-2.373,-5.55) 15(-1.873,-5.55) 16(-1.373,-5.55) 17(-0.873,-5.55) 18(-0.373,-5.55) 19(0.127,-5.55) 20(0.627,-5.55) 21(1.127,-5.55) 22(1.627,-5.55) 23(2.127,-5.55) 24(2.627,-5.55) 37(2.627,2.65) 38(2.127,2.65) 39(1.627,2.65) 40(1.127,2.65) 41(0.627,2.65) 42(0.127,2.65) 43(-0.373,2.65) 44(-0.873,2.65) 45(-1.373,2.65) 46(-1.873,2.65) 47(-2.373,2.65) 48(-2.873,2.65)
  silkscreen extent -4.35,-4.35 2.78,2.12
NRF24L01 [mil]
  round 62 hole 35: 1(0,0) 3(0,100) 4(-100,100) 5(0,200) 6(-100,200) 7(0,300) 8(-100,300)
  rect 62x62 hole 35: 2(-100,0)
  silkscreen extent -1065,-59 59,535
PCB-11 [mm]
  oval 2x3 hole 1 slot 2 at 90 deg: 1(0,0) 2(7.239,0) 3(7.239,5) 4(0,5)
  silkscreen extent -0.38,-1.52 7.62,6.48
PHONE_ST [mm]
  round 1.676 hole 1.676: 0(-3.556,0) 0(2.54,0)
  round 2 hole 1: 1(-3.35,-3) 1(-3.35,3) 2(0.15,-3) 2(0.15,3) 3(3.35,-3) 3(3.35,3)
  silkscreen extent -6.39,-3.01 7.49,3
PS2-6PIN [mm]
  round 1.6 hole 0.9: 1(-1.25,-8.5) 2(1.25,-8.5) 3(-3.25,-8.5) 4(3.25,-8.5) 5(-3.25,-11) 6(3.25,-11)
  oval 1.5x4 hole 1 slot 3.048 at 90 deg: 7(-7,-5.334) 9(7,-5.334)
  round 3.5 hole 2.3: S(0,-4.75)
  silkscreen extent -7,-12.75 7,0
QFN24 [mm]
  rect 2x2 smd: 0(0,0)
  rect 0.8x0.25 smd: 1(-2.101,1.25) 2(-2.101,0.75) 3(-2.101,0.25) 4(-2.101,-0.25) 5(-2.101,-0.75) 6(-2.101,-1.25) 13(2.101,-1.25) 14(2.101,-0.75) 15(2.101,-0.25) 16(2.101,0.25) 17(2.101,0.75) 18(2.101,1.25)
  rect 0.25x0.8 smd: 7(-1.25,-2.101) 8(-0.75,-2.101) 9(-0.25,-2.101) 10(0.25,-2.101) 11(0.75,-2.101) 12(1.25,-2.101) 19(1.25,2.101) 20(0.75,2.101) 21(0.25,2.101) 22(-0.25,2.101) 23(-0.75,2.101) 24(-1.25,2.101)
  silkscreen extent -2.66,-2 2,2.28
SDCARD_L [mm]
  rect 1.2x1.8 smd: 1(0,0) 2(-2.489,0) 3(-4.983,-0.009) 4(-7.483,-0.009) 5(-9.983,-0.009) 6(-12.483,-0.009) 7(-14.908,-0.009) 9(2.517,-0.009)
  rect 1.1x1.8 smd: 8(-16.612,0)
  rect 0.7x1.8 smd: 10(-17.908,-0.009) 12(-19.101,0)
  rect 1.5x2.8 smd: 11(-20.726,-23.834) 11(-20.726,-2.143) 11(4.826,-2.143) 11(7.01,-23.784)
  Keep-Out Layer circle w0.254: c-18.39,-3.3 r0.58
  Keep-Out Layer circle w0.254: c2.642,-3.26 r0.82
  silkscreen extent -20.13,-26.3 6.44,-0.9
SMBJ [mm]
  rect 1.5x3 smd: 1(-2.667,0) 2(2.921,0)
  silkscreen extent -1.02,-1.85 1.52,1.83
SMDLED [mm]
  rect 1.4x1.27 smd: 1(0.001,-0.002) 2(2.211,-0.002)
  silkscreen extent -0.8,-0.89 3.01,0.89
SOIC-8 [mil]
  rect 80x24 smd: 1(0,0) 2(0,-50.06) 3(0,-100.06) 4(0,-150.06) 5(270,-150) 6(270,-100) 7(270,-50) 8(270,0)
  silkscreen extent 65,-175 205,25
SOP16M [mm]
  rect 0.6x2.2 smd: 1(-4.445,-2.6) 2(-3.175,-2.6) 3(-1.905,-2.6) 4(-0.635,-2.6) 5(0.635,-2.6) 6(1.905,-2.6) 7(3.175,-2.6) 8(4.445,-2.6) 9(4.445,2.6) 10(3.175,2.6) 11(1.905,2.6) 12(0.635,2.6) 13(-0.635,2.6) 14(-1.905,2.6) 15(-3.175,2.6) 16(-4.445,2.6)
  silkscreen extent -5.42,-2.72 5,1.1
SOP-8 [mil]
  rect 65x25 smd: 1(0,0) 2(0,-50) 3(0,-100) 4(0,-150) 5(224.41,-150) 6(224.41,-100) 7(224.41,-50) 8(224.41,0)
  silkscreen extent 65,-175 159,25
SOT-23-6 [mil]
  rect 50x20 smd: 1(0,0) 2(0,-37.4) 3(0,-74.8) 4(100,-74.8) 5(100,-37.4) 6(100,0)
  silkscreen extent 0,-99 80,35
SOT-23R [mm]
  rect 0.9x0.95 smd: 1(0.95,-1.048) 2(-0.95,-1.048) 3(0,1.302)
  silkscreen extent -2.07,-1.17 1.3,1.3
TP-1.5 [mm]
  round 1.5 smd: 1(0,0)
TSOP44 [mm]
  rect 1.8x0.4 smd: 1(-0.009,0.001) 2(-0.009,-0.799) 3(-0.009,-1.599) 4(-0.009,-2.399) 5(-0.009,-3.199) 6(-0.009,-3.999) 7(-0.009,-4.799) 8(-0.009,-5.599) 9(-0.009,-6.399) 10(-0.009,-7.199) 11(-0.009,-7.999) 12(-0.009,-8.799) 13(-0.009,-9.599) 14(-0.009,-10.399) 15(-0.009,-11.199) 16(-0.009,-11.999) 17(-0.009,-12.799) 18(-0.009,-13.599) 19(-0.009,-14.399) 20(-0.009,-15.199) 21(-0.009,-15.999) 22(-0.009,-16.799) 23(11.991,-16.799) 24(11.991,-15.999) 25(11.991,-15.199) 26(11.991,-14.399) 27(11.991,-13.599) 28(11.991,-12.799) 29(11.991,-11.999) 30(11.991,-11.199) 31(11.991,-10.399) 32(11.991,-9.599) 33(11.991,-8.799) 34(11.991,-7.999) 35(11.991,-7.199) 36(11.991,-6.399) 37(11.991,-5.599) 38(11.991,-4.799) 39(11.991,-3.999) 40(11.991,-3.199) 41(11.991,-2.399) 42(11.991,-1.599) 43(11.991,-0.799) 44(11.991,0.001)
  silkscreen extent 1.83,-17.2 10.16,0.4
USB/SM0.8-6H5 [mm]
  rect 2.3x0.5 smd: 1(-7.85,-1.6) 2(-7.85,-0.8) 3(-7.85,0) 4(-7.85,0.8) 5(-7.85,1.6)
  rect 2.5x2 smd: 6(-7.75,4.45) 7(-1.996,4.45) 8(-7.75,-4.45) 9(-1.996,-4.45)
  round 0.6 hole 1.27 unplated: MH1(-5.25,2.2) MH2(-5.25,-2.2)
  silkscreen extent -9.68,-4.95 0.7,4.95
XTAL32 [mil]
  oval 50x40 hole 28: 1(0,0) 2(0,-56)
  rect 92.13x86 smd: ""(220,-27)
  silkscreen extent -28,-77 264,25
XTAL_US [mil]
  round 50 hole 28: 1(0,0) 2(192.13,0)
  silkscreen extent -131,-98 323,98

## Part data
ANT: "PCB接线端子"
BAT: library part BAT
BOOT: "Header, 3-Pin, Dual row"
C1 C5 C9 C85 C88: library part CAP
C2 C3 C4 C6 C7 C8 C10 C11 C12 C13 C14 C15 C16 C17 C18 C19 C20 C21 C22 C23 C24 C25 C26 C27 C28 C29 C30 C31 C32 C33 C34 C35 C36 C37 C38 C39 C40 C41 C42 C43 C44 C45 C46 C47 C48 C49 C50 C51 C52 C53 C54 C55 C56 C57 C58 C59 C60 C61 C62 C63 C64 C65 C66 C67 C68 C69 C70 C71 C72 C73 C74 C75 C76 C77 C78 C79 C80 C81 C82 C83 C84 C86 C87 C89 C90 C91 C92 C93 C94 C95 C96 C97 C98 C99: library part C
CAN RS485: library part HEAD3
COM "JOY PAD": library part DB9
D1 D2 D3 D4 D7: library part D
D5 D6: library part SMBJ, "TVS"
DC_IN: library part POW
DS0 DS1 SYS: library part LED2, "Typical RED, GREEN, YELLOW, AMBER GaAs LED"
F1 R1 R2 R3 R4 R5 R6 R7 R8 R9 R10 R11 R12 R13 R14 R15 R16 R17 R18 R19 R20 R21 R22 R23 R24 R25 R26 R27 R28 R29 R30 R31 R32 R33 R34 R35 R36 R37 R38 R39 R40 R41 R42 R43 R44 R45 R46 R47 R48 R49 R50 R51 R52 R53 R54 R55 R56 R57 R58 R59 R60 R61 R62 R63 R64 R65 R66 R67 R68 R69 R70 R71: library part R
L1: library part L_SOP
LINE_IN: library part PHONE_M
OLED: library part "Header 2_1", "Header, 2-Pin"
P1: library part "Header 5", "Header, 5-Pin"
P2 P3: library part "Header 2", "Header, 2-Pin"
P6 P7: library part "Header 2X2", "Header, 2-Pin, Dual row"
P8: library part "Header 9X2", "Header, 9-Pin, Dual row"
P9 P13 VOUT1 VOUT2: library part "Header 3X2", "Header, 3-Pin, Dual row"
P10 P11: library part "Header 6", "Header, 6-Pin"
P12: library part "Header 8", "Header, 8-Pin"
P14: library part HEAD2*27
PS/2: library part P/S2
Q1 Q2: library part NPN, "8050/BCW846/BCW847"
Q3: library part PNP, "8550/BCW68"
TP1 TP2 TP3: library part TEST-POINT, "测试点"
U1: library part TDA1308
U2: library part CD4052
U3: library part VS1053
U5: library part IS61LV51216
U8: library part MAX3232
U9: library part W25X16, "W25X16;SST25VF016;MX25L1605"
U10: library part MAX3485
U12: library part SN65HVD230D
U13: library part DHT11, "数字温湿度传感器"
U15: library part 24C256
U16 U19: library part AMS1117
U17: "DC DC Step Down IC"
U18: "USB2UART"
USB USB_232: library part USB5
Y1 Y5: library part XTAL_2, "Crystal Oscillator"
Y2: library part XTAL_3, "32.768K"
Y3: library part XTAL_1, "Crystal Oscillator"
Y4: library part XTAL, "Crystal Oscillator"

## Free pads (board coordinates)
  round 4 hole 3: 1(267.716,60.96) 2(115.57,61.087) 3(115.443,168.783) 4(268.351,169.545)

## Via types
v1: diameter 0.4, hole 0.3, Top Layer to Bottom Layer, 598 vias
v2: diameter 0.3, hole 0.2, Top Layer to Bottom Layer, 1 vias

## Nets (pads, with @x,y where several pads share a name; then routed paths per layer and width w, separated by ;. In a path a pad name is that pad's centre, name@x,y a point inside that pad or via, vN(x,y) a via of type N, cw(c..) or ccw(c..) an arc to the next point about the centre after c; other vN are vias at no path point)
"3D INT": P4.38 U6.49 U11.8 | length 59.2
  Top Layer w0.254: v1(182.372,112.395) 182.372,112.592 U6.49@183.398,113.618 185.102,115.322 189.849,115.322 190.004,115.167 198.034,115.167 198.089,115.221 203.867,115.221 209.296,120.65 P4.38@209.296,120.904 209.658,120.904 210.747,119.815 214.176,119.815 214.376,120.015 221.107,120.015 v1(222.123,121.031) ; v1@182.445,112.395 cw(c183.097,112.395) 182.636,112.856 ; P4.38@209.3,120.777 cw(c209.337,119.698) 210.101,120.461 ; P4.38@209.309,120.523 cw(c209.364,118.897) 210.514,120.048 ; P4.38@209.931,120.904 ccw(c210.59,120.904) 210.124,120.438 ; U11.8@223.426,129.096 224.599,129.096 v1(224.663,129.032) ; U11.8@224.013,129.009 cw(c224.223,128.799) 224.223,129.096 cw(c224.223,129.393) U11.8@224.013,129.183 ; 224.332,129.096 cw(c224.332,128.701) v1@224.611,128.98
  Bottom Layer w0.254: v1@182.32,112.343 cw(c182.15,112.173) 182.391,112.173 ; v1(182.372,112.395) v1@182.391,112.376 ; v1(222.123,121.031) 224.663,123.571 v1(224.663,129.032)
"A OUTL": C2.2 R5.1 | length 48.8
  Top Layer w0.254: C2.2@245.565,137.594 ccw(c245.132,138.027) 245.745,138.027 ccw(c246.358,138.027) C2.2@245.925,137.594 ; C2.2@245.745,137.414 245.745,138.303 v1(245.999,138.557) ; R5.1@258.064,107.518 259.004,108.458 v1(259.588,108.458) ; R5.1@258.064,107.772 ccw(c258.064,108.385) 258.498,107.952 ccw(c258.931,107.518) R5.1@258.318,107.518
  Bottom Layer w0.254: v1(245.999,138.557) 258.445,138.557 259.961,137.041 259.961,129.28 259.588,128.907 v1(259.588,108.458) ; 259.628,137.374 ccw(c259.969,137.716) v1@259.969,137.233
  other v1: 259.969,137.16
"A OUTR": C4.2 R2.1 | length 31.6
  Top Layer w0.254: C4.2@245.745,135.89 247.142,135.89 v1(247.396,136.144) ; C4.2@245.925,135.71 cw(c246.358,135.277) 246.358,135.89 cw(c246.358,136.503) C4.2@245.925,136.07 ; R2.1@246.685,110.693 R2.1@246.685,110.49 247.777,110.49 v1(247.904,110.363) ; R2.1@246.864,110.31 cw(c247.298,109.877) 247.298,110.49 cw(c247.298,111.103) R2.1@246.864,110.67 ; 247.421,110.49 cw(c247.421,109.88) v1@247.852,110.311
  Bottom Layer w0.254: v1(247.396,136.144) 247.396,110.871 v1(247.904,110.363)
AREF: C7.2 C8.2 R6.1 R9.2 U1.3 U1.5 | length 18.7
  Top Layer w1: R9.2@244.858,108.394 C7.2@246.89,108.394 250.254,108.394 U1.3@250.444,108.204 253.601,108.204 254.618,107.186 255.891,107.186 U1.5@256.144,106.934 256.159,106.934 258.058,105.035 259.15,105.035 R6.1@259.334,104.851 259.334,102.681 C8.2@259.336,102.679 ; U1.5@256.469,106.934 ccw(c257.219,106.934) 256.689,106.404
"ASEL A": P5.15 R14.1 U2.10 U6.123 | length 232.3
  Top Layer w0.254: P5.15@144.261,92.975 147.585,92.975 150.949,96.339 159.755,96.339 U6.123@164.306,100.89 ; P5.15@144.549,92.687 cw(c145.242,91.994) 145.242,92.975 cw(c145.242,93.956) P5.15@144.549,93.262 ; P5.15@144.728,92.508 cw(c145.856,91.38) 145.856,92.975 cw(c145.856,94.569) P5.15@144.728,93.442
  Top Layer w0.3: v1(158.496,165.354) 160.844,165.354 162.834,167.344 171.805,167.344 172.111,167.65 185.282,167.65 186.07,166.862 195.709,166.862 196.175,167.328 v1(233.992,167.328) ; U6.123@164.306,100.89 165.028,101.612 ; U2.10@239.245,134.966 cw(c239.832,134.988) 239.417,135.404 ; U2.10@239.289,135.078 ccw(c239.033,135.334) 239.395,135.334 ccw(c239.757,135.334) U2.10@239.501,135.078 ; U2.10@239.395,134.172 239.395,135.382 239.903,135.89 ; U2.10@239.545,134.978 cw(c240.769,135.023) 239.903,135.89 ; v1@241.681,135.84 cw(c241.681,135.413) 241.983,135.715 ; R14.1@244.197,134.204 ccw(c243.803,133.81) 243.803,134.368 ccw(c243.803,134.925) R14.1@244.197,134.531 ; R14.1@244.361,134.368 243.33,134.368 241.808,135.89 v1(241.681,135.89) 239.903,135.89
  Bottom Layer w0.3: P5.15@144.261,92.975 151.384,100.098 151.384,152.4 155.835,156.851 158.496,159.512 v1(158.496,165.354) ; P5.15@144.261,93.312 ccw(c144.261,94.127) 144.837,93.551 ccw(c145.413,92.975) P5.15@144.599,92.975 ; P5.15@144.261,93.612 ccw(c144.261,95.151) 145.349,94.063 ccw(c146.437,92.975) P5.15@144.899,92.975 ; v1(233.992,167.328) 238.379,162.941 238.522,162.941 241.681,159.782 v1(241.681,135.89)
"ASEL B": P5.3 R15.1 U2.9 U6.137 | length 234
  Top Layer w0.254: P5.3@144.261,77.735 145.045,77.735 153.797,86.487 159.802,86.487 U6.137@169.256,95.94 170.056,96.74 170.056,97.285 v1(170.18,97.409) ; 170.056,96.933 cw(c170.656,96.933) v1@170.232,97.357
  Top Layer w0.3: v1(160.02,166.243) 162.939,169.162 196.09,169.162 197.231,168.021 v1(236.728,168.021) ; U2.9@240.665,133.522 cw(c240.665,131.953) 241.775,133.062 ; U2.9@240.665,133.822 cw(c240.665,132.977) 241.262,133.575 ; U2.9@240.665,134.122 cw(c240.665,134.001) U2.9@240.75,134.087 ; U2.9@240.665,134.172 241.993,132.844 v1(242.697,132.844) R15.1@244.361,132.844 ; R15.1@244.197,132.68 ccw(c243.803,132.286) 243.803,132.844 ccw(c243.803,133.401) R15.1@244.197,133.007
  Bottom Layer w0.254: v1(160.02,166.243) 160.02,159.124 160.756,158.388 162.033,158.388 165.706,154.715 165.706,150.27 164.973,149.536 164.973,137.795 164.965,137.787 164.965,137.771 164.7,137.505 164.7,137.069 164.965,136.803 164.965,136.649 163.987,135.67 163.987,131.338 163.738,131.089 163.738,130.277 164.122,129.893 164.122,123.976 163.738,123.592 163.738,109.446 165.261,107.923 165.261,104.106 170.18,99.187 v1(170.18,97.409)
  Bottom Layer w0.3: v1(236.728,168.021) 236.728,165.442 242.697,159.473 v1(242.697,132.844)
AVDD: C26.2 C27.2 C28.2 C82.2 C83.2 R21.2 R64.1 U3.38 U3.43 U3.45 | length 52.7
  Top Layer w0.254: C82.2@218.959,92.634 ccw(c218.525,93.068) 219.138,93.068 ccw(c219.752,93.068) C82.2@219.318,92.634 ; C83.2@218.959,93.799 cw(c218.525,93.365) 219.138,93.365 cw(c219.752,93.365) C83.2@219.318,93.799 ; C83.2@219.138,94.232 ccw(c219.138,94.846) 219.572,94.412 ccw(c220.006,93.978) C83.2@219.392,93.978 ; C26.2@219.331,98.361 v1(220.091,98.361) C27.2@220.855,98.361 ; C26.2@219.51,98.182 cw(c219.944,97.748) 219.944,98.361 cw(c219.944,98.975) C26.2@219.51,98.541 ; 219.554,94.394 cw(c220.218,93.73) v1@220.218,94.669 ; 219.744,94.584 cw(c220.035,94.293) v1@220.191,94.674 ; 219.988,94.828 cw(c220.218,94.597) v1@220.218,94.923 ; v1(220.218,94.742) 219.902,94.742 C83.2@219.138,93.978 C82.2@219.138,92.454 223.783,92.454 R21.2@223.964,92.635 223.964,90.614 R64.1@223.977,90.602 ; v1@220.345,103.378 v1(220.377,103.41) U3.38@220.377,105.046 ; C27.2@220.675,98.182 ccw(c220.241,97.748) 220.241,98.361 ccw(c220.241,98.975) 220.675,98.541 ccw(c220.241,98.975) 220.855,98.975 ccw(c221.468,98.975) 221.034,98.541 ccw(c221.468,98.975) 221.468,98.361 ccw(c221.468,97.748) C27.2@221.034,98.182 ; v1(220.853,99.695) 220.855,99.693 C27.2@220.855,98.361 ; C28.2@222.199,98.182 ccw(c221.765,97.748) 221.765,98.361 ccw(c221.765,98.975) C28.2@222.199,98.541 ; C28.2@222.379,98.615 ccw(c222.379,99.229) 222.812,98.795 ccw(c223.246,98.361) C28.2@222.633,98.361 ; C28.2@222.662,98.645 ccw(c221.992,99.314) v1@222.939,99.314 ; v1@222.833,103.303 ccw(c222.663,103.473) 222.904,103.473 ; U3.43@222.877,105.046 222.904,105.019 v1@222.904,103.414 ; v1(222.885,103.251) v1@222.885,103.395 ; v1(223.012,99.314) 223.012,98.995 C28.2@222.379,98.361 C27.2@220.855,98.361 ; 223.095,99.078 ccw(c222.86,99.314) v1@223.193,99.314 ; R21.2@223.785,92.456 cw(c223.351,92.022) 223.964,92.022 cw(c224.578,92.022) R21.2@224.144,92.456 ; R64.1@223.798,90.781 ccw(c223.395,91.184) 223.964,91.184 ; 223.877,103.792 ccw(c224.569,103.792) v1@224.08,103.303 ; U3.45@223.877,105.046 223.877,103.275 223.901,103.251 v1(224.028,103.251) ; 223.964,91.246 ccw(c224.621,91.246) R64.1@224.157,90.781
  Bottom Layer w0.254: 220.091,95.225 ccw(c220.701,95.225) v1@220.27,94.794 ; v1(220.091,98.361) 220.091,94.869 v1(220.218,94.742) ; v1(220.377,103.41) 220.853,102.934 v1(220.853,99.695) ; v1@222.833,103.199 cw(c222.663,103.029) 222.904,103.029 ; v1(222.885,103.251) 222.885,103.395 222.904,103.414 222.904,99.422 v1(223.012,99.314) 223.877,100.179 223.877,103.275 223.901,103.251 v1(224.028,103.251) ; 222.904,99.751 ccw(c223.449,99.751) v1@223.064,99.366 ; 223.877,102.71 cw(c224.569,102.71) v1@224.08,103.199
"B OUTR": 
BEEP: P5.2 R58.2 U6.139 | length 57.5
  Top Layer w0.254: P5.2@141.721,75.195 142.224,75.195 143.338,74.08 146.089,74.08 148.009,76 148.009,78.921 154.305,85.217 159.947,85.217 U6.139@169.963,95.233 ; P5.2@141.729,75.043 cw(c141.799,73.656) 142.781,74.638 ; P5.2@141.742,74.789 cw(c141.838,72.886) 143.185,74.233 ; P5.2@142.382,75.195 ccw(c142.762,75.195) 142.493,74.926 ; v1@142.493,71.881 ccw(c142.797,72.185) 142.797,71.755 ; 142.621,71.755 148.779,71.755 ; v1@142.673,72.061 ccw(c143.41,72.798) 143.41,71.755 ; 147.625,71.755 ccw(c147.625,73.675) R58.2@148.982,72.317 ; 148.238,71.755 ccw(c148.238,73.061) R58.2@149.161,72.138 148.779,71.755 ; 148.851,71.755 ccw(c148.851,72.448) R58.2@149.341,71.958 ; R58.2@148.909,72.114 cw(c148.461,72.073) 148.779,71.755 ; R58.2@149.138,71.885 ccw(c149.097,71.437) 148.779,71.755
  Bottom Layer w0.254: P5.2@141.721,75.195 141.721,72.909 v1(142.621,72.009)
BOOT0: R40.1 R71.2 U6.138 | length 109.2
  Top Layer w0.254: v1(137.668,70.993) 137.837,70.824 169.921,70.824 170.048,70.697 170.82,70.697 171.097,70.974 176.817,70.974 182.259,65.532 R40.1@195.91,65.532 ; v1@137.72,71.045 ccw(c138.252,71.577) 138.252,70.824 ; v1@138.632,74.855 ccw(c138.048,75.439) 138.874,75.439 ; v1(138.684,74.803) 138.874,74.993 R71.2@138.874,76.198 139.003,76.327 144.429,76.327 145.376,77.273 145.376,77.304 153.924,85.852 159.875,85.852 U6.138@169.609,95.587 ; R71.2@138.695,76.019 cw(c138.261,75.585) 138.874,75.585 cw(c139.488,75.585) 139.054,76.019 cw(c139.798,75.275) 139.798,76.327 ; R40.1@195.731,65.352 ccw(c195.297,64.919) 195.297,65.532 ccw(c195.297,66.145) R40.1@195.731,65.712
  Bottom Layer w0.254: v1(137.668,70.993) 138.684,72.009 v1(138.684,74.803)
BOOT1: 2.4/2.8LCD.33 P4.35 R41.2 U6.48 | length 145.4
  Top Layer w0.254: U6.48@183.751,113.264 185.355,114.868 189.661,114.868 189.816,114.713 198.223,114.713 198.277,114.767 204.055,114.767 208.741,119.453 210.467,119.453 210.559,119.361 210.839,119.361 ; v1(194.945,70.739) 195.07,70.614 R41.2@196.405,70.614 ; v1@194.997,70.791 ccw(c195.424,71.218) 195.424,70.614 ; R41.2@196.226,70.434 ccw(c195.792,70) 195.792,70.614 ccw(c195.792,71.227) R41.2@196.226,70.793 ; P4.35@211.202,118.403 ccw(c209.957,118.479) 210.839,119.361 ; P4.35@211.456,118.387 ccw(c210.708,118.433) 211.238,118.962 ccw(c211.767,119.492) P4.35@211.813,118.744 ; P4.35@211.797,118.998 cw(c211.721,120.243) 210.839,119.361 ; P4.35@211.836,118.364 210.839,119.361
  Bottom Layer w0.254: v1(194.945,70.739) 203.454,70.739 205.105,72.39 204.832,72.663 204.832,113.519 ; 2.4/2.8LCD.33@197.145,150.917 cw(c196.018,149.79) 197.612,149.79 cw(c199.206,149.79) 2.4/2.8LCD.33@198.079,150.917 ; 2.4/2.8LCD.33@197.325,151.097 cw(c196.631,150.403) 197.612,150.403 cw(c198.593,150.403) 2.4/2.8LCD.33@197.899,151.097 ; 2.4/2.8LCD.33@197.612,151.384 197.612,147.584 198.857,146.339 200.19,146.339 201.544,144.985 201.544,116.807 204.832,113.519 ; P4.35@211.261,118.094 ccw(c210.836,117.894) 210.836,118.364 ; P4.35@211.261,118.634 cw(c210.836,118.834) 210.836,118.364 ; P4.35@211.836,118.364 210.836,118.364 ; 204.832,113.519 208.588,117.275 209.747,117.275 210.836,118.364
"CAN RX": P13.1 U12.4 | length 48.3
  Top Layer w0.254: v1(127.955,153.101) 130.495,153.101 U12.4@130.556,153.162 ; 129.949,153.101 ccw(c129.949,153.769) U12.4@130.421,153.297 ; U12.4@130.243,153.101 cw(c130.243,152.849) U12.4@130.421,153.027
  Bottom Layer w0.254: v1@128.016,153.162 v1(127.955,153.101) 127.955,134.56 126.425,133.03 126.046,133.03 125.415,132.399 125.415,131.507 126.046,130.876 126.552,130.876 127.955,129.473 127.955,128.967 128.524,128.398 P13.1@128.524,114.808 ; P13.1@128.083,115.249 ccw(c127.02,116.312) 128.524,116.312 ccw(c130.028,116.312) P13.1@128.965,115.249 ; P13.1@128.263,115.069 ccw(c127.633,115.699) 128.524,115.699 ccw(c129.415,115.699) P13.1@128.785,115.069
"CAN TX": P13.2 U12.1 | length 51.7
  Top Layer w0.254: v1(128.651,156.845) 128.778,156.972 U12.1@130.556,156.972 ; v1@128.703,156.793 cw(c129.134,156.362) 129.134,156.972 ; U12.1@130.421,156.837 ccw(c130.096,156.512) 130.096,156.972 ccw(c130.096,157.432) U12.1@130.421,157.107
  Bottom Layer w0.254: v1(128.651,156.845) 128.651,136.652 130.109,135.194 130.109,134.174 128.965,133.03 128.586,133.03 127.955,132.399 127.955,131.507 128.586,130.876 129.092,130.876 130.109,129.859 130.109,115.763 ; P13.2@130.443,114.857 ccw(c129.294,114.948) 130.109,115.763 ; P13.2@130.696,114.837 ccw(c130.016,114.891) 130.498,115.374 ccw(c130.981,115.856) P13.2@131.035,115.176 ; P13.2@131.015,115.429 cw(c130.924,116.578) 130.109,115.763 ; P13.2@131.064,114.808 130.109,115.763
"CD X0": R10.2 U2.12 | length 10.2
  Top Layer w0.5: 236.855,132.207 U2.12@236.855,134.172 ; v1(237.236,125.349) 237.238,125.347 R10.2@237.238,124.142
  Bottom Layer w0.5: 236.855,132.207 236.855,131.348 237.251,130.952 237.251,125.364 v1(237.236,125.349)
"CD X1": R12.2 U2.14 | length 8.1
  Top Layer w0.254: R12.2@230.959,138.314 cw(c230.525,137.88) 231.138,137.88 cw(c231.752,137.88) R12.2@231.318,138.314 ; R12.2@231.138,138.493 231.138,137.67 231.331,137.477 232.029,136.779 233.553,136.779 234.315,136.017 U2.14@234.315,134.172 ; U2.14@234.193,135.094 ccw(c233.897,135.39) 234.315,135.39 ccw(c234.733,135.39) U2.14@234.437,135.094
"CD XY2": R13.2 U2.2 U2.15 | length 4.3
  Top Layer w0.5: U2.2@233.01,128.137 cw(c232.614,127.741) 233.174,127.741 ; U2.2@233.045,128.972 233.174,128.843 R13.2@233.174,125.158
"CD Y0": R8.2 U2.1 | length 3.9
  Top Layer w0.254: R8.2@231.65,125.158 231.775,125.284 U2.1@231.775,128.972
"CD Y1": R11.2 U2.5 | length 14.4
  Top Layer w0.254: R11.2@232.493,138.305 cw(c232.15,137.924) 232.662,137.924 ; R11.2@232.662,138.493 232.662,137.924 ; R11.2@232.832,138.305 ccw(c233.175,137.924) 232.662,137.924 ; 233.963,137.233 cw(c233.963,136.808) v1@234.263,137.108 ; v1(234.315,137.16) 234.242,137.233 233.353,137.233 232.662,137.924 ; v1(236.601,130.683) 236.855,130.429 U2.5@236.855,128.972 ; U2.5@236.733,129.894 ccw(c236.437,130.19) 236.855,130.19 ccw(c237.273,130.19) U2.5@236.977,129.894
  Bottom Layer w0.254: v1(234.315,137.16) 234.315,131.699 235.331,130.683 v1(236.601,130.683)
"CH340 D+": U18.5 USB_232.3 | length 14.9
  Top Layer w0.254: USB_232.3@121.134,70.612 122.196,70.612 123.754,72.169 123.754,72.843 124.825,73.914 130.683,73.914 131.191,74.422 U18.5@131.191,76.648 ; U18.5@131.069,75.726 cw(c130.773,75.43) 131.191,75.43 cw(c131.609,75.43) U18.5@131.313,75.726
"CH340 D-": U18.6 USB_232.2 | length 17.7
  Top Layer w0.254: USB_232.2@121.134,71.412 122.197,71.412 123.3,72.515 123.3,73.031 124.945,74.676 125.112,74.676 125.131,74.657 130.283,74.657 v1(130.302,74.676) ; 130.08,74.657 ccw(c130.08,74.898) v1@130.25,74.728 ; U18.6@132.339,75.726 cw(c132.043,75.43) 132.461,75.43 cw(c132.879,75.43) U18.6@132.583,75.726 ; 132.461,74.905 ccw(c133.071,74.905) v1@132.64,74.474 ; U18.6@132.461,76.648 132.461,74.549 v1(132.588,74.422)
  Bottom Layer w0.254: v1(130.302,74.676) 130.302,74.549 v1@132.461,74.549 ; v1@130.354,74.728 ccw(c130.785,75.159) 130.785,74.549 ; 132.105,74.549 cw(c132.105,73.939) v1@132.536,74.37
CVDD: C14.2 C15.2 C16.2 C17.2 C93.2 C94.2 U3.5 U3.7 U3.24 U3.31 U19.2 U19.4 | length 88.8
  Top Layer w0.254: C14.2@217.422,115.633 219.011,115.633 219.877,114.768 U3.24@219.877,113.246 219.877,109.357 ; C14.2@217.602,115.454 cw(c218.036,115.02) 218.036,115.633 cw(c218.036,116.247) C14.2@217.602,115.813 ; U3.31@218.527,108.896 219.416,108.896 219.877,109.357 ; 225.729,109.288 cw(c226,109.017) U3.7@226.054,109.396 ; U3.7@226.727,109.396 225.838,109.396 225.425,108.983 ; C17.2@233.617,106.17 ccw(c233.003,106.17) 233.437,106.604 ccw(c233.87,107.038) C17.2@233.87,106.424 ; C16.2@233.691,111.049 ccw(c233.257,111.483) 233.87,111.483 ccw(c234.484,111.483) C16.2@234.05,111.049 ; C15.2@233.691,112.214 cw(c233.257,111.78) 233.87,111.78 cw(c234.484,111.78) 234.05,112.214 cw(c234.484,111.78) 234.484,112.393 cw(c234.484,113.007) C15.2@234.05,112.573 ; C16.2@233.87,110.869 C15.2@233.87,112.393 234.825,112.393 v1(234.95,112.268) v1(234.95,114.173) ; C17.2@234.05,105.991 cw(c234.484,105.557) 234.484,106.17 cw(c234.484,106.784) C17.2@234.05,106.35 ; 234.471,112.393 cw(c234.471,111.789) v1@234.898,112.216 ; v1(235.077,106.172) 235.075,106.17 C17.2@233.87,106.17 233.107,106.934 231.14,106.934 229.762,108.312 227.874,108.312 227.79,108.396 U3.5@226.727,108.396 226.681,108.442 225.792,108.442 225.6,108.634 225.6,108.664 225.425,108.839 225.425,108.983 ; v1(239.395,119.89) 241.935,119.89 ; v1(242.19,115.823) 241.935,116.078 241.935,119.89 ; C93.2@246.137,119.71 ccw(c245.703,119.276) 245.703,119.89 ccw(c245.703,120.503) C93.2@246.137,120.069 ; C93.2@246.316,119.89 241.935,119.89 ; 219.877,109.357 225.052,109.357 225.425,108.983
  Top Layer w1: v1(242.19,115.823) U19.2@250.95,115.823 U19.4@257.046,115.823 ; 245.446,123.069 cw(c245.874,122.641) C94.2@245.874,123.246 ; C94.2@245.874,123.126 245.504,123.126 244.672,122.294 244.672,121.19 245.973,119.89 C93.2@246.316,119.89 ; 245.933,119.93 ccw(c246.316,120.314) C93.2@246.316,119.771 ; U19.4@256.502,115.279 ccw(c255.187,113.964) 255.187,115.823 ccw(c255.187,117.682) U19.4@256.502,116.368
  Bottom Layer w0.254: 234.95,106.655 ccw(c235.56,106.655) v1@235.129,106.224 ; v1(234.95,112.268) 234.95,106.299 v1(235.077,106.172) ; v1(234.95,114.173) 239.395,118.618 v1(239.395,119.89)